# EAGLE board PCB_Ruler2 (EAGLE 6.3)
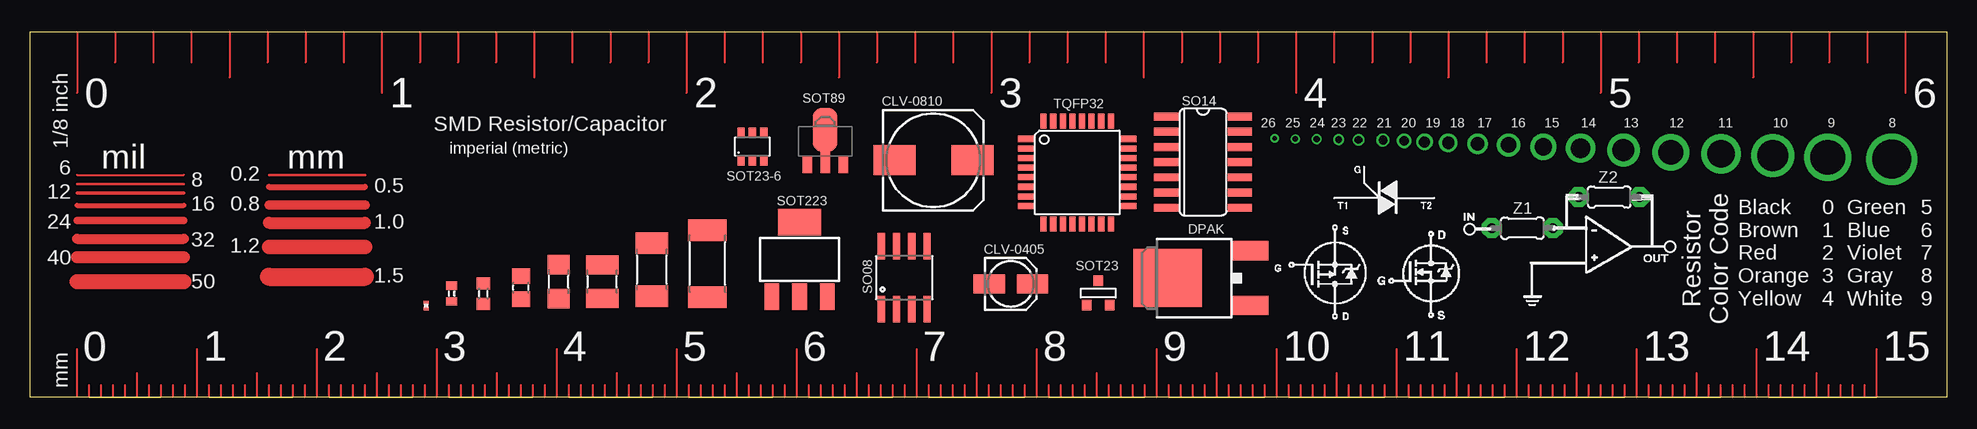
[diagram p0: board, top side]
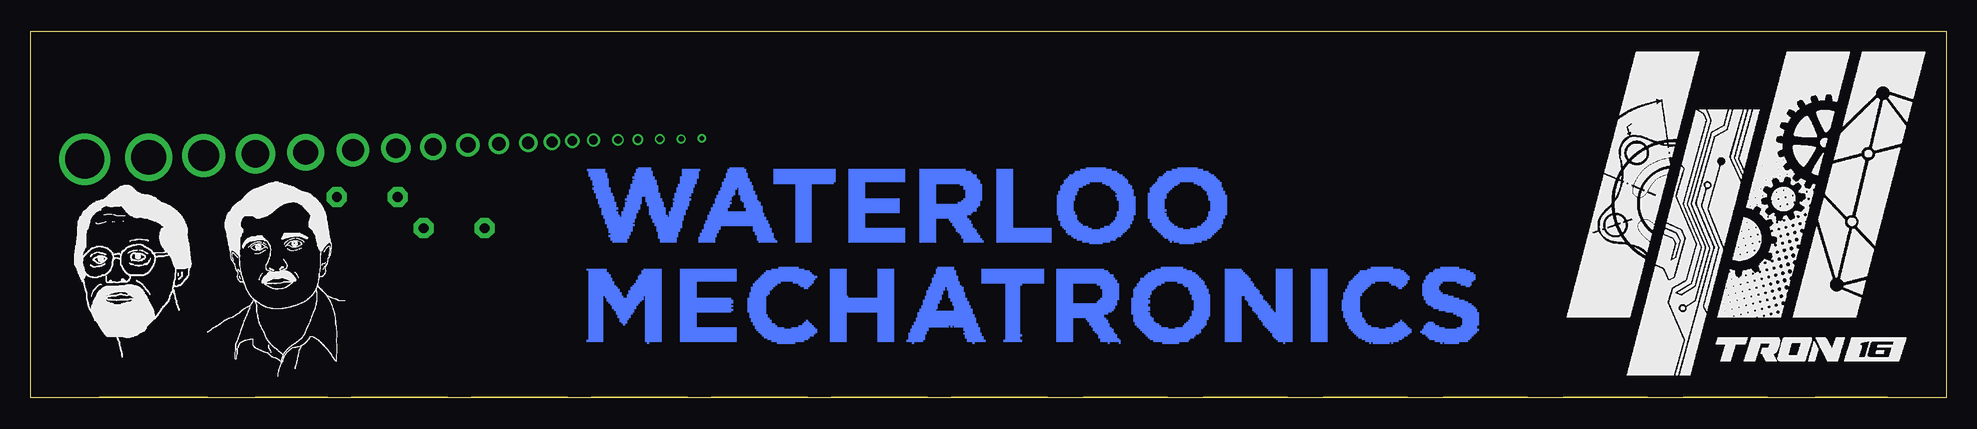
[diagram p1: board, bottom side, seen from below]

Size 159.75 x 30.48 mm. Coordinates in mm from the lower left corner, seen from the top.
Outline: 159.75,0 0,0 0,30.48 159.75,30.48 159.75,0
Copper layers (1*2*15*16): Top 0.035mm / dielectric 0.2mm / Route2 0.0175mm / dielectric 1.1mm / Route15 0.0175mm / dielectric 0.2mm / Bottom 0.035mm
Design rules "SeeedStudio_DRU_no_angle_20130527": minimum track width 6mil, minimum drill 12mil, track to track 6mil, track to pad 6mil, pad to pad 6mil, via to via 6mil, smd to smd 0mil, copper to edge 10mil, drill to drill 10mil, minimum pad ring 6mil, minimum via ring 6mil, stop-mask expansion 2mil, vias tented up to drill 25mil, thermal gap 10mil

## Footprints (pad centres in the part's own frame; a part is rotated, then mirrored left to right if it is on the bottom)
153CLV-0405 = smd 2.6 x 1.6: + 1.8,0; - -1.8,0
153CLV-0810 = smd 3.5 x 2.5: + 3.25,0; - -3.25,0
DPAK = smd 1.6 x 3: 1 -2.28,-5.31; 3 2.28,-5.31 | smd 4.826 x 5.715: 4 0,1.588
R0603 = smd 1 x 1.1: 1 -0.85,0; 2 0.85,0
R0805 = smd 1.3 x 1.5: 1 -0.95,0; 2 0.95,0
R1206 = smd 1.6 x 1.803: 1 -1.422,0; 2 1.422,0
R1210 = smd 1.6 x 2.7: 1 -1.4,0; 2 1.4,0
R2010 = smd 1.8 x 2.7: 1 -2.2,0; 2 2.2,0
R2512 = smd 1.8 x 3.2: 1 -2.8,0; 2 2.8,0
R0201 = smd 0.28 x 0.43: 1 -0.255,0; 2 0.255,0
R0402 = smd 0.7 x 0.9: 1 -0.65,0; 2 0.65,0
SO08 = smd 0.61 x 2.21: 1 -1.905,-2.616; 2 -0.635,-2.616; 3 0.635,-2.616; 4 1.905,-2.616; 5 1.905,2.616; 6 0.635,2.616; 7 -0.635,2.616; 8 -1.905,2.616
SO14 = smd 0.66 x 2.032: 1 -3.81,-3.073; 2 -2.54,-3.073; 3 -1.27,-3.073; 4 0,-3.073; 5 1.27,-3.073; 6 2.54,-3.073; 7 3.81,-3.073; 8 3.81,3.073; 9 2.54,3.073; 10 1.27,3.073; 11 0,3.073; 12 -1.27,3.073; 13 -2.54,3.073; 14 -3.81,3.073
SOT-23 = smd 0.787 x 0.889: 1 0.025,-1.016; 2 -0.94,1.016; 3 0.991,1.016
SOT23-6 = smd 0.6 x 0.9: 1 -0.95,-1.15; 2 0,-1.15; 3 0.95,-1.15; 4 0.95,1.15; 5 0,1.15; 6 -0.95,1.15
SOT89 = smd 0.8 x 1.4: 1 -1.499,-1.981; 3 1.499,-1.981 | smd 0.8 x 1.9: 2 0,-1.727 | smd 2.032 x 3.65: 2@1 0,0.94
SOT223 = smd 1.219 x 2.235: 1 -2.311,-3.099; 2 0,-3.099; 3 2.311,-3.099 | smd 3.6 x 2.2: 4 0,3.099
TQFP32-08 = smd 1.27 x 0.508: 1 -4.293,2.8; 2 -4.293,2; 3 -4.293,1.2; 4 -4.293,0.4; 5 -4.293,-0.4; 6 -4.293,-1.2; 7 -4.293,-2; 8 -4.293,-2.8; 17 4.293,-2.8; 18 4.293,-2; 19 4.293,-1.2; 20 4.293,-0.4; 21 4.293,0.4; 22 4.293,1.2; 23 4.293,2; 24 4.293,2.8 | smd 0.508 x 1.27: 9 -2.8,-4.293; 10 -2,-4.293; 11 -1.2,-4.293; 12 -0.4,-4.293; 13 0.4,-4.293; 14 1.2,-4.293; 15 2,-4.293; 16 2.8,-4.293; 25 2.8,4.293; 26 2,4.293; 27 1.2,4.293; 28 0.4,4.293; 29 -0.4,4.293; 30 -1.2,4.293; 31 -2,4.293; 32 -2.8,4.293
0204/5 = drill 0.813 pad 1.676 octagon: 1 -2.54,0; 2 2.54,0

## Placement (x,y rotation side)
CLV-0405  [153CLV-0405]  81.75,9.45 0 top
CLV-0810  [153CLV-0810]  75.3,19.76 0 top
DPAK  MOSFET-NCHANNELFDD8780  [DPAK]  96.42,9.93 90 top
R3  0603(1608)  [R0603]  37.79,8.64 90 top
R4  0805(2012)  [R0805]  40.93,9.14 90 top
R5  1206(3216)  [R1206]  44.06,9.64 90 top
R6  1210(3225)  [R1210]  47.69,9.64 90 top
R7  2010(5025)  [R2010]  51.83,10.64 90 top
R8  2512(6432)  [R2512]  56.47,11.14 90 top
R11  0201(0603)  [R0201]  33.02,7.64 90 top
R21  0402(1005)  [R0402]  35.16,8.64 90 top
SO08  MOSFET-NCHANNELFDS6630A  [SO08]  72.87,9.96 0 top
SO14  QUAD_OPAMPD  [SO14]  97.78,19.61 270 top
SOT23  [SOT-23]  89.07,8.69 180 top
SOT23-6  NPN-PNPSOR23-6  [SOT23-6]  60.21,20.9 0 top
SOT89  [SOT89]  66.28,21.36 0 top
SOT223  FZT753SMD  [SOT223]  64.15,11.48 0 top
TQFP32  ATMEGA32U2-TQFP  [TQFP32-08]  87.29,18.75 0 top
Z1  [0204/5]  124.39,14.1 0 top
Z2  [0204/5]  131.63,16.69 0 top

## Library data of the parts
CLV-0405 CLV-0810 SO14 TQFP32 Z1 Z2 = adafruit
DPAK = electric_imp; PROD_ID: TRANS-09984
R3-R8 R11 R21 = rcl
SO08 = electric_imp; PROD_ID: IC-08089
SOT23 = zetex; MPN: DSS20201L-7; OC_FARNELL: 1710688; OC_NEWARK: 25R4555
SOT23-6 = zetex; OC_FARNELL: unknown; OC_NEWARK: unknown
SOT89 = zetex; MPN: DSS4540X-13; OC_FARNELL: 1710677; OC_NEWARK: 25R4564
SOT223 = transistor-pnp

## Nets
V+: SO14.4
V-: SO14.11

## Tracks (layer width: path | path; a pad name or v marks a point on that pad's centre or on a via)
N$1
  Top 0.152: 156.32,30.48 156.32,25.4
N$2  (47 unrouted)
  Top 0.152: 153.15,30.48 153.15,27.94 | 149.97,30.48 149.97,27.94 | 146.8,30.48 146.8,27.94 | 143.62,30.48 143.62,26.67 | 140.45,30.48 140.45,27.94 | 137.27,30.48 137.27,27.94 | 134.1,30.48 134.1,27.94 | 130.92,30.48 130.92,25.4 | 127.75,30.48 127.75,27.94 | 124.57,30.48 124.57,27.94 | 121.4,30.48 121.4,27.94 | 118.22,30.48 118.22,26.67 | 115.05,30.48 115.05,27.94 | 111.87,30.48 111.87,27.94 | 108.7,30.48 108.7,27.94 | 105.52,30.48 105.52,25.4 | 102.35,30.48 102.35,27.94 | 99.17,30.48 99.17,27.94 | 96,30.48 96,27.94 | 92.82,30.48 92.82,26.67 | 89.65,30.48 89.65,27.94 | 86.47,30.48 86.47,27.94 | 83.3,30.48 83.3,27.94 | 80.12,30.48 80.12,25.4 | 76.95,30.48 76.95,27.94 | 73.77,30.48 73.77,27.94 | 70.6,30.48 70.6,27.94 | 67.42,30.48 67.42,26.67 | 64.25,30.48 64.25,27.94 | 61.07,30.48 61.07,27.94 | 57.9,30.48 57.9,27.94 | 54.72,30.48 54.72,25.4 | 51.55,30.48 51.55,27.94 | 48.37,30.48 48.37,27.94 | 45.2,30.48 45.2,27.94 | 42.02,30.48 42.02,26.67 | 38.85,30.48 38.85,27.94 | 35.67,30.48 35.67,27.94 | 32.5,30.48 32.5,27.94 | 29.32,30.48 29.32,25.4 | 26.15,30.48 26.15,27.94 | 22.97,30.48 22.97,27.94 | 19.8,30.48 19.8,27.94 | 16.62,30.48 16.62,26.67 | 13.45,30.48 13.45,27.94 | 10.27,30.48 10.27,27.94 | 7.1,30.48 7.1,27.94 | 3.92,30.48 3.92,25.4
N$3
  Top 0.152: 3.92,0 3.92,4
N$4  (8 unrouted)
  Top 0.152: 4.92,0 4.92,1 | 5.92,0 5.92,1 | 6.92,0 6.92,1 | 7.92,0 7.92,1 | 8.92,0 8.92,2 | 9.92,0 9.92,1 | 10.92,0 10.92,1 | 11.92,0 11.92,1 | 12.92,0 12.92,1
N$5
  Top 0.152: 13.92,0 13.92,4
N$6  (8 unrouted)
  Top 0.152: 14.92,0 14.92,1 | 15.92,0 15.92,1 | 16.92,0 16.92,1 | 17.92,0 17.92,1 | 18.92,0 18.92,2 | 19.92,0 19.92,1 | 20.92,0 20.92,1 | 21.92,0 21.92,1 | 22.92,0 22.92,1
N$7
  Top 0.152: 23.92,0 23.92,4
N$8  (8 unrouted)
  Top 0.152: 24.92,0 24.92,1 | 25.92,0 25.92,1 | 26.92,0 26.92,1 | 27.92,0 27.92,1 | 28.92,0 28.92,2 | 29.92,0 29.92,1 | 30.92,0 30.92,1 | 31.92,0 31.92,1 | 32.92,0 32.92,1
N$9
  Top 0.152: 33.92,0 33.92,4
N$10  (8 unrouted)
  Top 0.152: 34.92,0 34.92,1 | 35.92,0 35.92,1 | 36.92,0 36.92,1 | 37.92,0 37.92,1 | 38.92,0 38.92,2 | 39.92,0 39.92,1 | 40.92,0 40.92,1 | 41.92,0 41.92,1 | 42.92,0 42.92,1
N$11
  Top 0.152: 43.92,0 43.92,4
N$12  (8 unrouted)
  Top 0.152: 44.92,0 44.92,1 | 45.92,0 45.92,1 | 46.92,0 46.92,1 | 47.92,0 47.92,1 | 48.92,0 48.92,2 | 49.92,0 49.92,1 | 50.92,0 50.92,1 | 51.92,0 51.92,1 | 52.92,0 52.92,1
N$13
  Top 0.152: 53.92,0 53.92,4
N$14  (8 unrouted)
  Top 0.152: 54.92,0 54.92,1 | 55.92,0 55.92,1 | 56.92,0 56.92,1 | 57.92,0 57.92,1 | 58.92,0 58.92,2 | 59.92,0 59.92,1 | 60.92,0 60.92,1 | 61.92,0 61.92,1 | 62.92,0 62.92,1
N$15
  Top 0.152: 63.92,0 63.92,4
N$16  (8 unrouted)
  Top 0.152: 64.92,0 64.92,1 | 65.92,0 65.92,1 | 66.92,0 66.92,1 | 67.92,0 67.92,1 | 68.92,0 68.92,2 | 69.92,0 69.92,1 | 70.92,0 70.92,1 | 71.92,0 71.92,1 | 72.92,0 72.92,1
N$17
  Top 0.152: 73.92,0 73.92,4
N$18  (8 unrouted)
  Top 0.152: 74.92,0 74.92,1 | 75.92,0 75.92,1 | 76.92,0 76.92,1 | 77.92,0 77.92,1 | 78.92,0 78.92,2 | 79.92,0 79.92,1 | 80.92,0 80.92,1 | 81.92,0 81.92,1 | 82.92,0 82.92,1
N$19
  Top 0.152: 83.92,0 83.92,4
N$20  (8 unrouted)
  Top 0.152: 84.92,0 84.92,1 | 85.92,0 85.92,1 | 86.92,0 86.92,1 | 87.92,0 87.92,1 | 88.92,0 88.92,2 | 89.92,0 89.92,1 | 90.92,0 90.92,1 | 91.92,0 91.92,1 | 92.92,0 92.92,1
N$21
  Top 0.152: 93.92,0 93.92,4
N$22  (8 unrouted)
  Top 0.152: 94.92,0 94.92,1 | 95.92,0 95.92,1 | 96.92,0 96.92,1 | 97.92,0 97.92,1 | 98.92,0 98.92,2 | 99.92,0 99.92,1 | 100.92,0 100.92,1 | 101.92,0 101.92,1 | 102.92,0 102.92,1
N$23
  Top 0.152: 103.92,0 103.92,4
N$24  (8 unrouted)
  Top 0.152: 104.92,0 104.92,1 | 105.92,0 105.92,1 | 106.92,0 106.92,1 | 107.92,0 107.92,1 | 108.92,0 108.92,2 | 109.92,0 109.92,1 | 110.92,0 110.92,1 | 111.92,0 111.92,1 | 112.92,0 112.92,1
N$25
  Top 0.152: 113.92,0 113.92,4
N$26  (8 unrouted)
  Top 0.152: 114.92,0 114.92,1 | 115.92,0 115.92,1 | 116.92,0 116.92,1 | 117.92,0 117.92,1 | 118.92,0 118.92,2 | 119.92,0 119.92,1 | 120.92,0 120.92,1 | 121.92,0 121.92,1 | 122.92,0 122.92,1
N$27
  Top 0.152: 123.92,0 123.92,4
N$28  (8 unrouted)
  Top 0.152: 124.92,0 124.92,1 | 125.92,0 125.92,1 | 126.92,0 126.92,1 | 127.92,0 127.92,1 | 128.92,0 128.92,2 | 129.92,0 129.92,1 | 130.92,0 130.92,1 | 131.92,0 131.92,1 | 132.92,0 132.92,1
N$29
  Top 0.152: 133.92,0 133.92,4
N$30  (8 unrouted)
  Top 0.152: 134.92,0 134.92,1 | 135.92,0 135.92,1 | 136.92,0 136.92,1 | 137.92,0 137.92,1 | 138.92,0 138.92,2 | 139.92,0 139.92,1 | 140.92,0 140.92,1 | 141.92,0 141.92,1 | 142.92,0 142.92,1
N$31
  Top 0.152: 143.92,0 143.92,4
N$32  (9 unrouted)
  Top 0.152: 144.92,0 144.92,1 | 145.92,0 145.92,1 | 146.92,0 146.92,1 | 147.92,0 147.92,1 | 148.92,0 148.92,2 | 149.92,0 149.92,1 | 150.92,0 150.92,1 | 151.92,0 151.92,1 | 152.92,0 152.92,1 | 153.92,0 153.92,4
N$33
  Top 0.152: 3.92,18.54 12.81,18.54
N$34
  Top 0.203: 3.92,17.78 12.81,17.78
N$35
  Top 0.305: 3.92,17.02 12.81,17.02
N$36
  Top 0.406: 3.92,16 12.81,16
N$37
  Top 0.61: 3.92,14.73 12.81,14.73
N$38
  Top 0.813: 3.92,13.21 12.81,13.21
N$39
  Top 1.016: 3.92,11.68 12.81,11.68
N$40
  Top 1.27: 3.92,9.65 12.81,9.65
N$41
  Top 0.2: 19.92,18.54 27.92,18.54
N$42
  Top 0.5: 19.92,17.54 27.92,17.54
N$43
  Top 0.8: 19.92,16.04 27.92,16.04
N$44
  Top 1: 19.92,14.54 27.92,14.54
N$45
  Top 1.2: 19.92,12.54 27.92,12.54
N$46
  Top 1.5: 19.92,10.04 27.92,10.04
N$47  (via drill 3.26)
  other vias: 155.18,19.85
N$48  (via drill 2.91)
  other vias: 149.85,20.01
N$49  (via drill 2.59)
  other vias: 145.28,20.14
N$50  (via drill 2.3)
  other vias: 140.96,20.3
N$51  (via drill 2.05)
  other vias: 136.77,20.43
N$52  (via drill 1.83)
  other vias: 132.83,20.62
N$53  (via drill 1.63)
  other vias: 129.25,20.77
N$54  (via drill 1.45)
  other vias: 126.15,20.88
N$55  (via drill 1.29)
  other vias: 123.25,21.03
N$56  (via drill 1.15)
  other vias: 120.66,21.13
N$57  (via drill 1.02)
  other vias: 118.22,21.21
N$58  (via drill 0.91)
  other vias: 116.24,21.29
N$59  (via drill 0.81)
  other vias: 114.54,21.39
N$60  (via drill 0.72)
  other vias: 112.79,21.44
N$61  (via drill 0.64)
  other vias: 110.73,21.46
N$62  (via drill 0.57)
  other vias: 109.08,21.49
N$63  (via drill 0.51)
  other vias: 107.25,21.54
N$64  (via drill 0.45)
  other vias: 105.47,21.54
N$65  (via drill 0.4)
  other vias: 103.75,21.59
(copper drawn outside any net)
  shapes: Bottom area x1236

## Text on the board
tNames: 0 | 1 | 2 | 3 | 4 | 5 | 6 | SMD Resistor/Capacitor | 26 | 25 | 24 | 23 | 22 | 21 | 20 | 19 | 18 | 17 | 16 | 15 | 14 | 13 | 12 | 11 | 10 | 9 | 8 | 1/8 inch | imperial (metric) | 6 | mil | mm | 8 | 0.2 | 12 | 0.5 | 16 | 0.8 | 24 | 1.0 | 32 | 1.2 | Resistor / Color Code | 40 | 1.5 | 50 | Black / Brown / Red / Orange / Yellow | 0 / 1 / 2 / 3 / 4 | Green / Blue / Violet / Gray / White | 5 / 6 / 7 / 8 / 9 | 0 | 1 | 2 | 3 | 4 | 5 | 6 | 7 | 8 | 9 | 10 | 11 | 12 | 13 | 14 | 15 | mm